# Altium PCB LeoBlinky2018.PcbDoc
Units mm, origin at the board's own origin, x right, y up, seen from the top; angles counter-clockwise.
Board outline 140 x 67 mm, 2 copper layers (Top Layer, Bottom Layer), stack 0.98 mm thick; 46 components, 62 nets, 221 pads, 70 vias.
Unrouted connection lines stored in the file: 16.
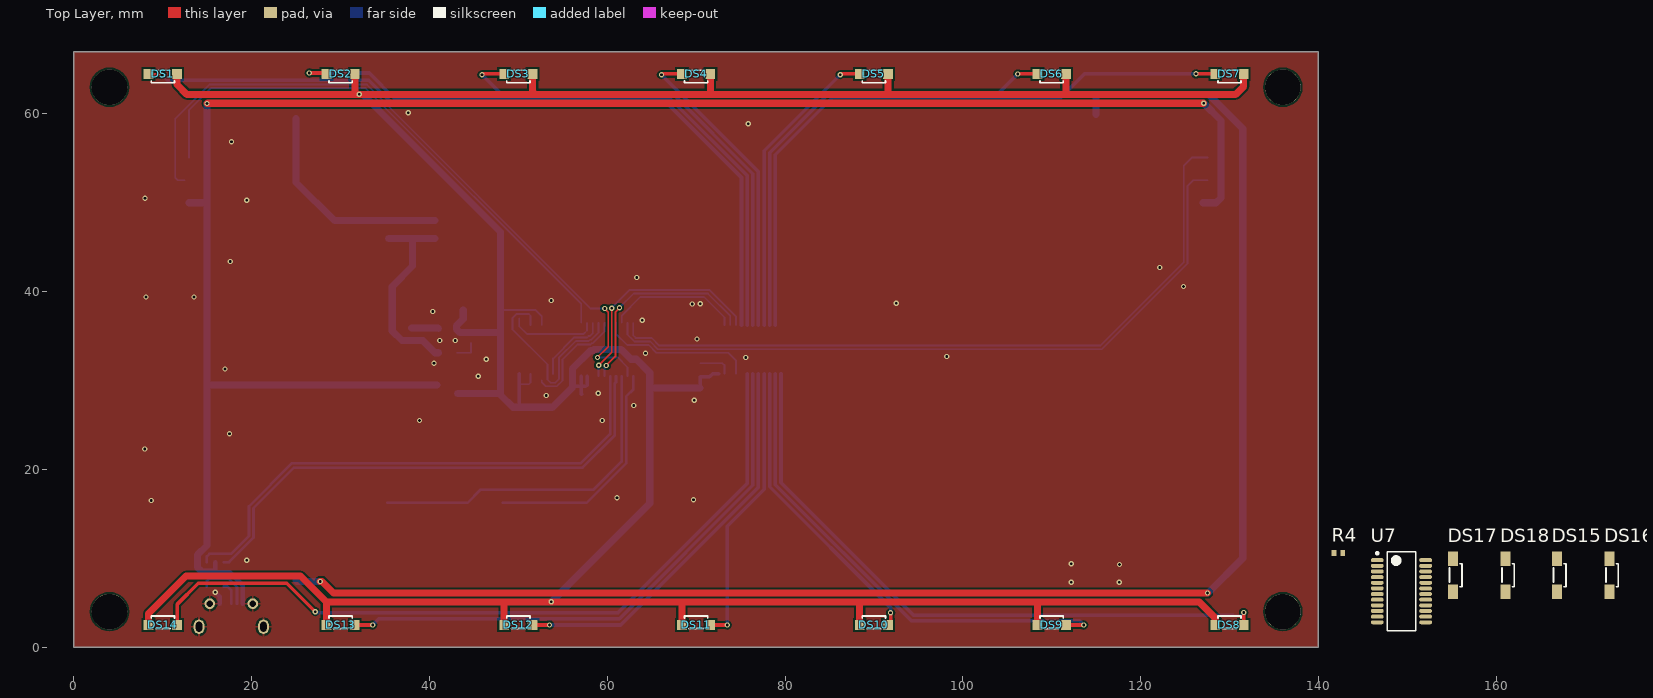
[diagram p0: Top Layer view]
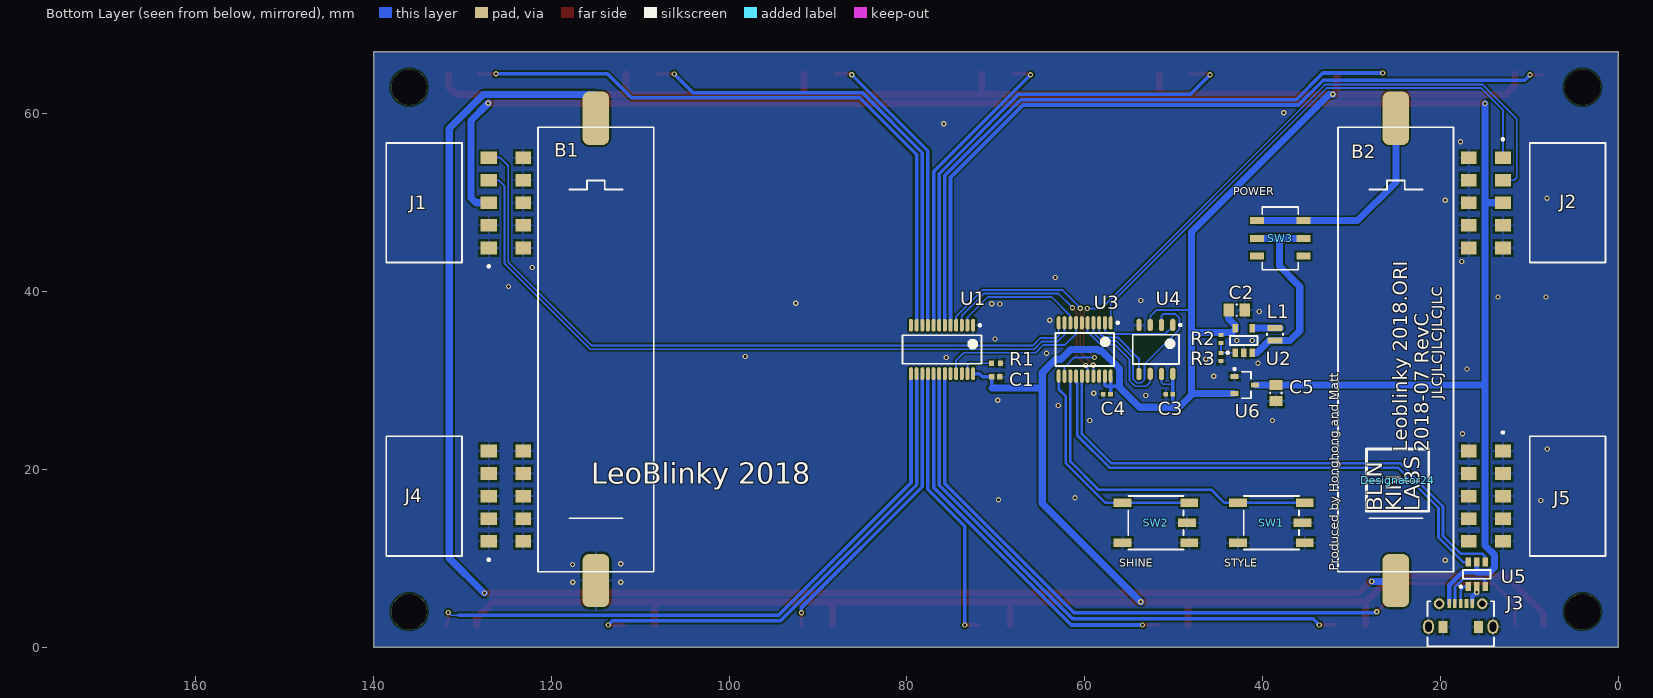
[diagram p1: Bottom Layer view, seen from below]

## Layer stack, top to bottom
Top Solder: solder mask 0.01, Solder Resist, Dk 3.5
Top Layer: signal copper 0.035
Dielectric 1: dielectric 0.91, FR-4, Dk 4.8
Bottom Layer: signal copper 0.035
Bottom Solder: solder mask 0.01, Solder Resist, Dk 3.5

## Board outline
0,0 0,67 140,67 140,0

## Design rules (kind name [scope] priority, off if disabled: settings)
Clearance [All] p1: gap=0.2 ignorepadtopadclearanceinfootprint=FALSE
DiffPairsRouting [All] p1: maxlimit=0.2 minlimit=0.2 mostfreqgap=0.2 toplayer_minwidth=0.3 toplayer_maxwidth=0.6 toplayer_prefwidth=0.6 bottomlayer_minwidth=0.3 bottomlayer_maxwidth=0.6 bottomlayer_prefwidth=0.6 maxuncoupledlength=12.7
PolygonConnect [All] p1: thpad.connectstyle=Relief thpad.reliefconductorwidth=0.254 thpad.reliefentries=4 thpad.polygonreliefangle="90 Angle" thpad.airgapwidth=0.254 smdpad.connectstyle=Relief smdpad.reliefconductorwidth=0.254 smdpad.reliefentries=4 smdpad.polygonreliefangle="90 Angle" smdpad.airgapwidth=0.254 via.connectstyle=Direct via.reliefconductorwidth=0.254 via.reliefentries=4 via.polygonreliefangle="90 Angle" via.airgapwidth=0.254
RoomDefinition LeoBlinky2018 [InComponentClass('LeoBlinky2018')] p1: confinementstyle=ConfineIn formatcopy=TRUE lockcomponents=FALSE outline -3,-1.5 -3,71.5 143,71.5 143,-1.5
RoutingVias [All] p1: holewidth=0.711 width=1.27 viastyle="Through Hole" minholewidth=0.3 minwidth=0.6 maxholewidth=0.711 maxwidth=1.27
SolderMaskExpansion SolderMaskExpansion_Via [IsVia] p1: expansion=-99
SolderMaskExpansion [All] p2: expansion=0.102
Width [All] p1: maxlimit=2 minlimit=0.2 preferedwidth=0.4
29 further rules are at their usual default settings.

## Classes and differential pairs
differential pair USB_D: +USB_D_P -USB_D_N

## Components (designator, comment, footprint, x,y, rotation, side; value= is the part's Value field where it differs from the comment)
B1 "AAA_SMD" AAA_SMD 115,33.5 r90 bottom
B2 "AAA_SMD" AAA_SMD 25,33.5 r90 bottom
C1 "CAP 100nF 16V 0402(1005)" CAPC0402(1005)60_N 70,30.425 r0 bottom value=100nF
C2 "CAP 10uF 10V 0805(2012)" CAPC0805(2012)145_N 42.895,37.925 r0 bottom value=10uF
C3 "CAP 100nF 10V 0402(1005)" CAPC0402(1005)60_L 50.495,28.45 r180 bottom value=100nF
C4 "CAP 100nF 10V 0402(1005)" CAPC0402(1005)60_L 57.5,28.45 r180 bottom value=100nF
C5 "CAP 10uF 10V 0805(2012)" CAPC0805(2012)145_N 38.5,28.6 r90 bottom value=10uF
Designator24 "Comment" BLINKINLABS_LOGO 24.8,18.8 r90 bottom
DS1 "LED_335_GENERIC" LED_335_GENERIC#1 10,64.5 r0 top
DS2 "LED_335_GENERIC" LED_335_GENERIC#1 30,64.5 r0 top
DS3 "LED_335_GENERIC" LED_335_GENERIC#1 50,64.5 r0 top
DS4 "LED_335_GENERIC" LED_335_GENERIC#1 70,64.5 r0 top
DS5 "LED_335_GENERIC" LED_335_GENERIC#1 90,64.5 r0 top
DS6 "LED_335_GENERIC" LED_335_GENERIC#1 110,64.5 r0 top
DS7 "LED_335_GENERIC" LED_335_GENERIC#1 130,64.5 r0 top
DS8 "LED_335_GENERIC" LED_335_GENERIC#1 130,2.5 r180 top
DS9 "LED_335_GENERIC" LED_335_GENERIC#1 110,2.5 r180 top
DS10 "LED_335_GENERIC" LED_335_GENERIC#1 90,2.5 r180 top
DS11 "LED_335_GENERIC" LED_335_GENERIC#1 70,2.5 r180 top
DS12 "LED_335_GENERIC" LED_335_GENERIC#1 50,2.5 r180 top
DS13 "LED_335_GENERIC" LED_335_GENERIC#1 30,2.5 r180 top
DS14 "LED_335_GENERIC" LED_335_GENERIC#1 10,2.5 r180 top
DS15 "LED_335_GENERIC" LED_335_GENERIC#2 166.849,8.1 r90 top
DS16 "LED_335_GENERIC" LED_335_GENERIC#2 172.749,8.1 r90 top
DS17 "LED_335_GENERIC" LED_335_GENERIC#2 155.149,8.1 r90 top
DS18 "LED_335_GENERIC" LED_335_GENERIC#2 161.049,8.1 r90 top
J1 "SMH-105-02-T-D" SMTC-SMH-105-02-X-D 130.5,50 r90 bottom
J2 "SMH-105-02-T-D" SMTC-SMH-105-02-X-D 9.5,50 r270 bottom
J3 "A01SB741B1-267" A01SB741B1-267 17.7,4.9 r0 bottom
J4 "SMH-105-02-T-D" SMTC-SMH-105-02-X-D 130.5,17 r90 bottom
J5 "SMH-105-02-T-D" SMTC-SMH-105-02-X-D 9.5,17 r270 bottom
L1 "FNR201610S2R2MT" FNR201610S 38.611,35.2 r90 bottom
R1 "2K 1% 0402(1005)" RESC0402(1005)_N 70,31.95 r0 bottom value="2000.00 Ohm"
R2 "200K 1% 0402(1005)" RESC0402(1005)_L 44.675,34.7 r90 bottom value="200000.00 Ohm"
R3 "51K 1% 0402(1005)" RESC0402(1005)_L 44.675,32.675 r90 bottom value="51000.00 Ohm"
R4 "2K 1% 0402(1005)" RESC0402(1005)_N 142.249,10.6 r0 top value="2000.00 Ohm"
SW1 "STYLE" TD-07XB 39,14 r0 bottom
SW2 "SHINE" TD-07XB 52,14 r0 bottom
SW3 "POWER" MSK-1133-NOHOLE 38,46 r180 bottom
U1 "ICN2053" SOP64P600X175-24N 76.058,33.5 r270 bottom
U2 "BL8542C" SOT95P280X130-5N 42.111,34.5 r90 bottom
U3 "CH554T" TSOP65P660X110-20N 60,33.5 r270 bottom
U4 "FM25Q08A-SO" SOP127P600X175-8N 52,33.5 r270 bottom
U5 "USBLC6-2SC6" SOT95P280X145-6N 15.9,8.2 r90 bottom
U6 "SC662K-3.3V" SOT95P230X117-3N 42,29.5 r180 bottom
U7 "ICN2053" SOP64P600X175-24N 149.349,6.3 r0 top

## Footprints (in the part's own frame and the unit in brackets; to place one, negate y for a bottom-side part, rotate by r counter-clockwise, add the part's x,y. Pads: shape width x height; smd on the part's side, far side on the other; paste and mask are expansions set on the pad)
A01SB741B1-267 [mm] "micro usb B type"
  rect 0.4x1 smd: D+(0,0) D-(0.65,0) GND(-1.3,0) ID(-0.65,0) VBUS(1.3,0)
  rrect100% 1.2x1.6 hole 0.7 slot 1.1 at 90 deg: S1(-3.625,2.6) S2(3.625,2.6)
  round 1.2 hole 0.7: S3(-2.425,0) S4(2.425,0)
  rect 1x1.35 smd: S5(-2,2.6) S6(2,2.6)
  silkscreen extent -3.75,-0.26 3.75,4.8, body extent -3.75,-0.3 3.75,4.78, height 2.44
AAA_SMD [mm]
  rrect50% 6x3 smd paste+0: 1(26,0) 2(-26,0)
  silkscreen extent -25,-6.5 25,6.5, body extent -25,-6.58 25,6.58, height 12
BLINKINLABS_LOGO [mm] "Square blinkinlabs logo"
  silkscreen extent -3.51,-3.51 3.5,3.5
CAPC0402(1005)60_L [mm] "Chip Capacitor, Body 1.0x0.5mm, Height 0.6mm, IPC High Density"
  rect 0.52x0.52 smd: 1(-0.4,0) 2(0.4,0)
  body extent -0.55,-0.3 0.55,0.3, height 0.6
CAPC0402(1005)60_N [mm] "Chip Capacitor, Body 1.0x0.5mm, Height 0.6mm, IPC Medium Density"
  rect 0.62x0.62 smd: 1(-0.45,0) 2(0.45,0)
  body extent -0.55,-0.3 0.55,0.3, height 0.6
CAPC0805(2012)145_N [mm] "Chip Capacitor, Body 2.0x1.2mm, Height 1.45mm, IPC Medium Density"
  rect 1.15x1.45 smd: 1(-0.9,0) 2(0.9,0)
  silkscreen extent -0.05,-0.62 0.05,0.63, body extent -1.1,-0.72 1.1,0.73, height 1.45
FNR201610S [mm] "Wire Wound SMD Power Inductors 2.0×1.6×1.0"
  rrect25% 0.7x1.7 smd paste+0: 1(-0.7,0) 2(0.7,0)
  silkscreen extent -0.1,-0.9 0.1,0.9, body extent -1,-0.8 1,0.8, height 0.95
LED_335_GENERIC#1 [mm] "SMD LED, side visible, generic"
  rect 1.1x1.1 smd paste+0: 1(-1.6,0) 2(1.6,0)
  silkscreen extent -1.3,-1 1.3,0.4, body extent -2,-1 2,0.4, height 0.8
LED_335_GENERIC#2 [mm] "SMD LED, side visible, generic"
  rect 1.6x1.1 smd paste+0: 1(-1.85,0) 2(1.85,0)
  silkscreen extent -1.3,-1 1.3,0.4, body extent -2,-1 2,0.4, height 0.8
MSK-1133-NOHOLE [mm] "SMD micro toggle switch, 2 position, 2 circuit"
  rect 1.55x0.8 smd paste+0: 1(-2.62,2) 2(-2.62,0) 3(-2.62,-2) 4(2.62,-2) 5(2.62,0) 6(2.62,2)
  silkscreen extent -2.02,-3.52 2.02,3.52
RESC0402(1005)_L [mm] "Chip Resistor, Body 1.0x0.5mm, IPC High Density"
  rect 0.45x0.55 smd: 1(-0.45,0) 2(0.45,0)
  body extent -0.52,-0.27 0.53,0.28, height 0.4
RESC0402(1005)_N [mm] "Chip Resistor, Body 1.0x0.5mm, IPC Medium Density"
  rect 0.55x0.65 smd: 1(-0.5,0) 2(0.5,0)
  body extent -0.52,-0.27 0.53,0.28, height 0.4
SMTC-SMH-105-02-X-D [mm] "Horizontal SMT Socket Assembly, 2x5 Pins, 2.54mm Pitch, Female"
  rect 1.42x1.83 smd: 1(-5.08,-3.453) 3(-2.54,-3.453) 5(0,-3.453) 7(2.54,-3.453) 9(5.08,-3.453)
  rect 1.42x1.73 smd: 2(-5.08,-7.313) 4(-2.54,-7.313) 6(0,-7.313) 8(2.54,-7.313) 10(5.08,-7.313)
  silkscreen extent -7.28,-3.58 6.73,8.08, body extent -6.6,-7.67 6.6,8.08, height 4.95
SOP64P600X175-24N [mm] "SOP, 24-Leads, Body 8.65x3.90mm, Pitch 0.64mm, IPC Medium Density"
  oval 1.45x0.45 smd: 1(-2.725,3.492) 2(-2.725,2.857) 3(-2.725,2.222) 4(-2.725,1.587) 5(-2.725,0.952) 6(-2.725,0.317) 7(-2.725,-0.318) 8(-2.725,-0.953) 9(-2.725,-1.588) 10(-2.725,-2.223) 11(-2.725,-2.858) 12(-2.725,-3.493) 13(2.725,-3.493) 14(2.725,-2.858) 15(2.725,-2.223) 16(2.725,-1.588) 17(2.725,-0.953) 18(2.725,-0.318) 19(2.725,0.317) 20(2.725,0.952) 21(2.725,1.587) 22(2.725,2.222) 23(2.725,2.857) 24(2.725,3.492)
  silkscreen extent -2.85,-4.45 1.6,4.45, body extent -3,-4.45 3,4.45, height 1.75
SOP127P600X175-8N [mm] "SOP, 8-Leads, Body 4.93x3.90mm, Pitch 1.27mm, IPC Medium Density"
  oval 1.4x0.6 smd: 1(-2.75,1.905) 2(-2.75,0.635) 3(-2.75,-0.635) 4(-2.75,-1.905) 5(2.75,-1.905) 6(2.75,-0.635) 7(2.75,0.635) 8(2.75,1.905)
  silkscreen extent -2.87,-2.6 1.65,2.88, body extent -3,-2.6 3,2.6, height 1.75
SOT95P230X117-3N [mm] "SOT23, 3-Leads, Body 2.90x2.30mm, Pitch 0.95mm, IPC Medium Density"
  rect 0.9x0.6 smd: 1(-1.15,0.95) 2(-1.15,-0.95) 3(1.15,0)
  silkscreen extent -1.28,-1.5 0.7,1.92, body extent -1.24,-1.5 1.25,1.5, height 1.17
SOT95P280X130-5N [mm] "SOT23, 5-Leads, Body 2.90x2.80mm, Pitch 0.95mm, IPC Medium Density"
  rect 0.95x0.6 smd: 1(-1.375,0.95) 2(-1.375,0) 3(-1.375,-0.95) 4(1.375,-0.95) 5(1.375,0.95)
  silkscreen extent -1.5,-1.55 0.5,1.93, body extent -1.5,-1.55 1.5,1.55, height 1.3
SOT95P280X145-6N [mm] "SOT23, 6-Leads, Body 2.93x2.80mm, Pitch 0.95mm, IPC Medium Density"
  rect 1x0.6 smd: 1(-1.375,0.95) 2(-1.375,0) 3(-1.375,-0.95) 4(1.375,-0.95) 5(1.375,0) 6(1.375,0.95)
  silkscreen extent -1.5,-1.55 0.5,1.93, body extent -1.6,-1.52 1.6,1.53, height 1.45
TD-07XB [mm] "TACT SWITCH"
  rect 2x1 smd paste+0: 1(-3.75,-2.25) 2(3.75,-2.25) 3(-3.75,2.25) 4(3.75,2.25) 5(-3.5,0)
  silkscreen extent -3.1,-3 3.1,3
TSOP65P660X110-20N [mm] "TSOP, 20-Leads, Body 6.50x4.40mm, Pitch 0.65mm, IPC Medium Density"
  oval 1.5x0.45 smd: 1(-3,2.925) 2(-3,2.275) 3(-3,1.625) 4(-3,0.975) 5(-3,0.325) 6(-3,-0.325) 7(-3,-0.975) 8(-3,-1.625) 9(-3,-2.275) 10(-3,-2.925) 11(3,-2.925) 12(3,-2.275) 13(3,-1.625) 14(3,-0.975) 15(3,-0.325) 16(3,0.325) 17(3,0.975) 18(3,1.625) 19(3,2.275) 20(3,2.925)
  silkscreen extent -3.12,-3.3 1.85,3.82, body extent -3.3,-3.3 3.3,3.3, height 1.1

## Part data
B1 B2: "AAA battery holder, surface mount."
C1: library part CMP-1034-02071-1, "CAP 100nF 16V -20% to +80% 0402 (1005 Metric) Thickness 0.6mm SMD", Case-EIA=0402, Case-Metric=1005, Rated Voltage="16 V", Tolerance="-20% to +80%", Max Thickness="0.6 mm", Technology=SMT
C2 C5: library part CMP-1036-04922-1, "CAP 10uF 10V ±10% 0805 (2012 Metric) Thickness 1.45mm SMD", Case-EIA=0805, Case-Metric=2012, Rated Voltage="10 V", Tolerance=±10%, Max Thickness="1.45 mm", Technology=SMT
C3 C4: library part CMP-1034-02065-1, "CAP 100nF 10V ±10% 0402 (1005 Metric) Thickness 0.6mm SMD", Case-EIA=0402, Case-Metric=1005, Rated Voltage="10 V", Tolerance=±10%, Max Thickness="0.6 mm", Technology=SMT
DS1 DS2 DS3 DS4 DS5 DS6 DS7 DS8 DS9 DS10 DS11 DS12 DS13 DS14 DS15 DS16 DS17 DS18: "SMD LED, side visible, generic"
J1 J2 J4 J5: library part CMP-1023-00158-1, "SMT Horizontal Socket, -55 to 105 degC, 2.54 mm Pitch, 10-Pin, Female, RoHS", Manufacturer=Samtec, Temperature Range="-55 to 105 degC", ComponentLink1Description="Manufacturer URL", ComponentLink1URL=http://www.samtec.com, ComponentLink2Description=Datasheet, ComponentLink2URL=http://www.samtec.com/documents/webfiles/pdf/SMH.PDF, ComponentLink3Description="Package Specification", ComponentLink3URL=http://www.samtec.com/documents/webfiles/cpdf/SMH-1XX-XX-XX-X-XX-MKT.pdf, DatasheetVersion=F-214, Mounting Technology="Surface Mount", Orientation=Horizontal, PackageDescription=".100 [2.54] Horizontal SMT Socket Assembly", PackageReference=SMH-105-02-X-D, PackageVersion="AF, 2/1999", PartNumber=SMH-105-02-T-D, Pitch="2.54 mm", RoHS=True
J3: "Micro USB B type ??????"
L1: "Wire Wound SMD Power Inductors 2.0×1.6×1.0 2.2uH"
R1 R4: library part CMP-1011-00542-1, "2K 0.063W 1% 0402 (1005 Metric)  SMD", Case-EIA=0402, Case-Metric=1005, Power="0.063 W", Tolerance="1 %", Technology=SMT
R2: library part CMP-1011-00768-1, "200K 0.063W 1% 0402 (1005 Metric)  SMD", Case-EIA=0402, Case-Metric=1005, Power="0.063 W", Tolerance="1 %", Technology=SMT
R3: library part CMP-1011-00703-1, "51K 0.063W 1% 0402 (1005 Metric)  SMD", Case-EIA=0402, Case-Metric=1005, Power="0.063 W", Tolerance="1 %", Technology=SMT
SW1 SW2: library part TD-07XB, "Tact Switch", Manufacturer="ShenZhen XieJia Electronics Co Ltd", PartNumber=TD-07XB
SW3: library part MSK-1133, "SMD micro toggle switch, 2 position, 2 circuit"
U1 U7: "16-Channel PWM Constant Current LED Sink Driver", Manufacturer=ChipOne, PartNumber=ICN2053
U2: "0.85V startup, 1MHz, 300mA Iout,  Synchronous Boost Converter (adjustable output)", Manufacturer=Belling, PartNumber=BL8542C
U3: "8-bit enhanced USB microcontroller", Manufacturer=WCH, PartNumber=CH554T
U4: "8M-BIT SERIAL FLASH MEMORY, 150mil width", Manufacturer="Shanghai Fudan Microelectronics Group Company Limited", PartNumber=FM25Q08A-SO
U5: "Very low capacitance ESD protection", Manufacturer=STMicroelectronics, ComponentLink2Description=Datasheet, ComponentLink2URL=USBLC6-2.pdf, PartNumber=USBLC6-2SC6
U6: "3.3V, 250mA Low dropout voltage regulator IC"

## Free pads (board coordinates)
  round 4 hole 4 paste-99: 1(4,4) 1(4,63) 1(136,4) 1(136,63)

## Via types
v1: diameter 0.6, hole 0.3, Top Layer to Bottom Layer, 70 vias

## Nets (pads, with @x,y where several pads share a name; then routed paths per layer and width w, separated by ;. In a path a pad name is that pad's centre, name@x,y a point inside that pad or via, vN(x,y) a via of type N, cw(c..) or ccw(c..) an arc to the next point about the centre after c; other vN are vias at no path point)
5V_USB: C5.2 J1.5 J2.5 J3.VBUS U5.5 U6.3 | length 215.6
  Top Layer w0.8: v1(14.975,61.162) 15.013,61.2 v1(127.1,61.2)
  Bottom Layer w0.5: U5.5 15.9,8.45 17.531,8.45 19,6.981 J3.VBUS
  Bottom Layer w0.8: J2.5 14.7,50 14.968,50.268 ; v1(14.975,61.162) 14.975,51.975 14.968,51.968 14.968,50.268 ; 15.9,8.45 14.426,8.45 13.9,8.976 13.9,10.393 14.968,11.461 14.968,29.5 ; U6.3 C5.2 14.968,29.5 ; J1.5 128.5,50 129.05,50.55 129.05,59.25 v1(127.1,61.2) ; 14.968,29.5 14.968,50.268
BUTTON1: SW1.1 SW1.2 U3.13 | length 37.9
  Bottom Layer w0.3: SW1.1 SW1.2 44.262,16.25 45.712,17.7 58.425,17.7 61.625,20.9 U3.13
BUTTON2: SW2.1 SW2.2 U3.11 | length 25.9
  Bottom Layer w0.3: SW2.1 SW2.2 57.682,16.25 62.125,20.693 62.125,28.189 62.925,28.989 U3.11
FLASH_CS: U3.2 U4.1 | length 9.9
  Bottom Layer w0.2: 50.095,37 50.095,36.086 50.931,35.25 57.338,35.25 57.725,35.637 U3.2
FLASH_MISO: U3.4 U4.2 | length 22.6
  Bottom Layer w0.2: U4.2 51.365,37.281 51.152,37.494 49.819,37.494 49.325,37 49.325,35.764 53.275,31.814 53.275,30.1 53.625,29.75 54.154,29.75 54.558,30.154 54.558,32.555 56.452,34.45 57.922,34.45 58.071,34.6 58.2,34.6 59.025,35.425 U3.4
FLASH_MOSI: U3.3 U4.5 | length 8.5
  Bottom Layer w0.2: U4.5 53.905,32.468 56.287,34.85 57.756,34.85 57.906,35 58.034,35 58.375,35.341 U3.3
FLASH_SCK: U3.5 U4.6 | length 12.4
  Bottom Layer w0.2: 52.635,30 52.635,29.8 53.085,29.35 54.319,29.35 54.975,30.006 54.975,32.407 56.618,34.05 58.087,34.05 58.237,34.2 58.365,34.2 59.675,35.51 U3.5
GND: B1.2 C1.1 C2.1 C3.1 C4.1 C5.1 J1.1 J1.2 J1.3 J1.4 J1.6 J1.8 J1.10 J2.2 J2.4 J2.6 J2.7 J2.8 J2.9 J2.10 J3.GND J3.S1 J3.S2 J3.S3 J3.S4 J3.S5 J3.S6 J4.1 J4.2 J4.3 J4.4 J4.5 J4.6 J4.7 J4.8 J4.9 J4.10 J5.1 J5.2 J5.3 J5.4 J5.5 J5.6 J5.7 J5.8 J5.9 J5.10 R1.1 R3.1 R4.1 SW1.3 SW1.4 SW1.5 SW2.3 SW2.4 SW2.5 U1.1 U2.2 U3.18 U4.4 U5.2 U6.1 U7.1 | length 1.5
  Bottom Layer w0.5: v1(15.9,6.2) 16.4,5.7 J3.GND
  other v1: 112.2,7.3 117.6,7.3 117.625,9.3 112.2,9.375 19.425,9.8 8.7,16.5 69.7,16.607 61.1,16.8 7.98,22.3 17.5,24 38.879,25.5 59.433,25.5 62.99,27.2 69.8,27.8 53.135,28.323 59,28.577 45.482,30.5 17,31.3 40.5,31.95 46.4,32.4 75.6,32.6 98.2,32.7 64.3,33.058 41.161,34.5 42.895,34.5 70.1,34.675 63.937,36.8 40.38,37.767 69.55,38.612 70.45,38.625 92.5,38.7 53.699,39 8.1,39.4 13.5,39.4 124.825,40.575 63.325,41.6 122.175,42.725 17.6,43.4 19.425,50.275 8,50.5 17.725,56.85 75.875,58.9 37.6,60.12
LED0: DS1.1 U1.5 | length 88
  Top Layer w0.4: DS1.1@8.5,64.4 v1(9.9,64.4)
  Bottom Layer w0.4: v1(9.9,64.4) 10.5,63.8 33.173,63.8 35.973,61 66.954,61 75.105,52.849 U1.5
LED1: DS2.1 U1.6 | length 72.6
  Top Layer w0.4: v1(26.487,64.6) 28.05,64.6 DS2.1@28.15,64.5
  Bottom Layer w0.4: v1(26.487,64.6) 33.221,64.6 36.221,61.6 67.203,61.6 75.74,53.063 U1.6
LED2: DS3.1 U1.7 | length 54.4
  Top Layer w0.4: v1(45.9,64.4) 46,64.5 DS3.1@48.15,64.5
  Bottom Layer w0.4: v1(45.9,64.4) 48.1,62.2 67.451,62.2 76.375,53.276 U1.7
LED3: DS4.1 U1.8 | length 34.8
  Top Layer w0.4: v1(66.1,64.4) 66.2,64.5 DS4.1@68.15,64.5
  Bottom Layer w0.4: v1(66.1,64.4) 77.01,53.49 U1.8
LED4: DS5.1 U1.9 | length 33.7
  Top Layer w0.4: v1(86.2,64.4) 86.3,64.5 DS5.1@88.15,64.5
  Bottom Layer w0.4: U1.9 77.645,55.845 v1(86.2,64.4)
LED5: DS6.1 U1.10 | length 52.9
  Top Layer w0.4: v1(106.2,64.484) 106.216,64.5 DS6.1@108.15,64.5
  Bottom Layer w0.4: U1.10 78.28,55.632 85.049,62.4 104.116,62.4 v1(106.2,64.484)
LED6: DS7.1 U1.11 | length 72.2
  Top Layer w0.4: v1(126.239,64.5) DS7.1@128.15,64.5
  Bottom Layer w0.4: U1.11 78.915,55.418 85.297,61.8 111,61.8 113.7,64.5 v1(126.239,64.5)
LED7: DS15.1 U1.12
LED8: DS8.1 U1.13 | length 72.1
  Top Layer w0.4: v1(131.6,3.9) 131.6,2.75 DS8.1@131.85,2.5
  Bottom Layer w0.2: 130.4,3.6 131.3,3.6 v1(131.6,3.9)
  Bottom Layer w0.4: U1.13 79.55,18.498 94.449,3.6 130.4,3.6
LED9: DS9.1 U1.14 | length 55.5
  Top Layer w0.4: DS9.1@111.85,2.5 v1(113.6,2.5)
  Bottom Layer w0.4: U1.14 78.915,18.285 94.2,3 113.1,3 v1(113.6,2.5)
LED10: DS10.1 U1.15 | length 33.9
  Top Layer w0.4: DS10.1@91.85,2.5 91.875,2.525 v1(91.875,3.875)
  Bottom Layer w0.4: U1.15 78.28,18.071 91.875,4.476 v1(91.875,3.875)
LED11: DS11.1 U1.16 | length 31.6
  Top Layer w0.4: DS11.1@71.85,2.5 v1(73.5,2.5)
  Bottom Layer w0.4: v1(73.5,2.5) 73.5,13.625 77.645,17.77 U1.16
LED12: DS12.1 U1.17 | length 44.4
  Top Layer w0.4: DS12.1@51.85,2.5 v1(53.5,2.5)
  Bottom Layer w0.4: v1(53.5,2.5) 61.52,2.5 77.01,17.99 U1.17
LED13: DS13.1 U1.18 | length 63.6
  Top Layer w0.4: DS13.1@31.85,2.5 v1(33.6,2.5)
  Bottom Layer w0.4: v1(33.6,2.5) 34.3,3.2 61.372,3.2 76.375,18.204 U1.18
LED14: DS14.1 U1.19 | length 87.2
  Top Layer w0.4: DS14.1 11.6,4.8 14,7.2 23.947,7.2 v1(27.147,4)
  Bottom Layer w0.4: v1(27.147,4) 27.247,3.9 29.8,3.9 61.223,3.9 75.74,18.417 U1.19
LED15: DS16.1 U1.20
LED16: DS17.1 U7.5
LED17: U7.6
LED18: U7.7
LED19: U7.8
LED20: U7.9
LED21: U7.10
LED22: U7.11
LED23: U7.12
LED24: DS18.1 U7.13
LED25: U7.14
LED26: U7.15
LED27: U7.16
LED28: U7.17
LED29: U7.18
LED30: U7.19
LED31: U7.20
LED_CLK: U1.3 U3.16 U7.3 | length 23.4
  Top Layer w0.2: v1(59.9,31.7) 60.913,32.713 60.913,37.692 61.371,38.15 v1(61.371,38.209)
  Bottom Layer w0.2: U3.16 v1@59.675,31.575 ; v1@61.371,38.2 62.971,39.8 71.326,39.8 73.835,37.291 U1.3
LED_GCLK: U1.21 U3.7 U7.21 | length 17.5
  Bottom Layer w0.2: U3.7 60.975,35.274 62.249,34 64.649,34 65.516,33.133 73.617,33.133 74.47,32.28 U1.21
LED_LE: U1.4 U3.17 U7.4 | length 25.3
  Top Layer w0.2: v1(59.025,31.719) 60.505,33.199 60.505,35.9 60.513,35.908 v1(60.513,38.141)
  Bottom Layer w0.2: U3.17 v1(59.025,31.719) ; v1(60.513,38.141) 60.513,38.184 60.505,38.192 62.513,40.2 71.491,40.2 74.47,37.221 U1.4
LED_MOSI: U1.2 U3.8 | length 15.1
  Bottom Layer w0.2: U3.8 61.625,37.3 63.725,39.4 70.9,39.4 73.2,37.1 U1.2
LED_MOSI1: U1.22 U7.2
NetB1_1: B1.1 B2.2 | length 177.3
  Top Layer w0.8: v1(27.7,7.4) 27.912,7.4 29.212,6.1 v1(127.534,6.1)
  Bottom Layer w0.8: B2.2 25.1,7.4 v1(27.7,7.4) ; B1.1@115,59.958 115,62.1 115.1,62.2 127.675,62.2 131.5,58.375 131.5,10 127.6,6.1 v1(127.534,6.1)
NetL1_2: L1.2 U2.4 | length 3
  Bottom Layer w0.8: L1.2@38,35.9 L1.2 40.975,35.9 U2.4@41,35.875
NetR1_2: R1.2 U1.23 | length 3.7
  Bottom Layer w0.2: R1.2 72.958,31.95 73.2,31.708 U1.23
NetR4_2: R4.2 U7.23
RESET: U3.6
RXD: J1.9 U3.10 | length 81.6
  Bottom Layer w0.2: U3.10 62.925,35.066 63.191,34.8 64.98,34.8 65.847,33.933 115.483,33.933 124.869,43.319 124.869,54.169 125.78,55.08 J1.9 J1.9@127.547,55.08
RXD1: J2.3 U3.12 | length 79.1
  Top Layer w0.2: v1(58.9,32.6) 60.105,33.805 60.105,36.066 60.113,36.074 60.113,37.692 v1(59.705,38.1)
  Bottom Layer w0.2: J2.3@12.453,52.54 11.693,52.54 11.4,52.833 11.4,59.472 15.228,63.3 32.966,63.3 58.166,38.1 v1(59.705,38.1) ; v1(58.9,32.6) 61.175,32.6 62.275,31.5 U3.12
TXD: J1.7 U3.9 | length 80.3
  Bottom Layer w0.2: U3.9 62.275,35.15 63.025,34.4 64.814,34.4 65.682,33.533 115.648,33.533 125.269,43.153 125.269,51.878 125.931,52.54 J1.7 J1.7@127.547,52.54
TXD1: J2.1 U3.1 | length 62.7
  Bottom Layer w0.2: J2.1 12.953,60.459 15.394,62.9 32.8,62.9 57.075,38.625 U3.1
USB_D_N: U3.15 U5.4 | length 60.2
  Bottom Layer w0.3: U5.4 14.95,10.224 15.226,10.5 17.664,10.5 19.7,12.536 19.7,15.857 24.543,20.7 57.029,20.7 60.325,23.996 U3.15
USB_D_P: U3.14 U5.6 | length 58.6
  Bottom Layer w0.3: U5.6 17.447,9.575 20.2,12.328 20.2,15.65 24.75,20.2 57.236,20.2 60.825,23.789 60.825,29.662 60.975,29.812 U3.14
USB_IN_D_N: J3.D- U5.3 | length 6.4
  Bottom Layer w0.3: U5.3 14.95,7.447 15.203,7.7 17.432,7.7 18.35,6.782 J3.D-
USB_IN_D_P: J3.D+ U5.1 | length 2.5
  Bottom Layer w0.3: U5.1 17.275,6.825 17.7,6.4 J3.D+
VBAT: L1.1 SW3.2 SW3.5 U2.3 | length 22.8
  Bottom Layer w0.8: SW3.5 38.1,46 ; SW3.2 38.1,46 ; U2.3@41,33.125 40.614,33.125 39.239,34.5 L1.1 36.9,34.5 35.817,35.583 35.817,40.6 38.1,42.883 38.1,46
VBAT_IN: B2.1 SW3.1 SW3.6 | length 24.6
  Bottom Layer w0.8: B2.1 25,52.3 29.3,48 SW3.6 SW3.1
VCC: C1.2 C2.2 C3.2 C4.2 DS1.2 DS2.2 DS3.2 DS4.2 DS5.2 DS6.2 DS7.2 DS8.2 DS9.2 DS10.2 DS11.2 DS12.2 DS13.2 DS14.2 DS15.2 DS16.2 DS17.2 DS18.2 R2.2 U1.24 U2.5 U3.19 U3.20 U4.3 U4.7 U4.8 U6.2 U7.24 | length 406.6
  Top Layer w0.8: DS14.2 8.4,3.8 12.6,8 25.5,8 28.4,5.1 ; DS1.2 11.6,63.3 12.7,62.2 v1@31.9,62.2 ; DS13.2 28.4,5.1 ; DS2.2 31.6,62.5 v1@31.9,62.2 ; DS12.2 48.4,4.85 48.15,5.1 ; DS3.2 51.6,62.5 51.9,62.2 ; 68.15,5.094 68.4,4.844 DS11.2 ; DS4.2 71.6,62.3 71.7,62.2 ; DS10.2 88.4,4.85 88.15,5.1 ; DS5.2 91.6,62.45 91.85,62.2 ; DS9.2 108.4,4.85 108.15,5.1 ; DS6.2 111.6,62.4 111.8,62.2 ; DS8.2 128.4,3.3 126.6,5.1 108.15,5.1 ; DS7.2 131.6,63.1 130.7,62.2 111.8,62.2 ; 28.4,5.1 48.15,5.1 ; v1@31.9,62.2 v1(32.1,62.2) 51.9,62.2 ; 48.15,5.1 68.15,5.1 88.15,5.1 ; 51.9,62.2 71.7,62.2 ; 71.7,62.2 91.85,62.2 ; 88.15,5.1 108.15,5.1 ; 91.85,62.2 111.8,62.2
  Bottom Layer w0.2: 48,37.602 48.323,37.925 51.95,37.925 52.635,37.24 U4.3 ; 50.095,29.575 51.185,29.575 51.365,29.755 U4.7
  Bottom Layer w0.4: 50.095,27 C3.2 50.095,29.575 U4.8 ; 56.1,29.253 56.197,29.35 57.075,29.35 ; U3.20 57.075,29.35 ; C4.2 57.075,28.475 57.075,29.35 ; U3.19 57.725,29.49 57.585,29.35 57.075,29.35 ; 70.45,29.15 C1.2 71.5,30.425 71.85,30.775 U1.24
  Bottom Layer w0.8: v1(32.1,62.2) 32.51,62.2 48,46.71 48,37.602 48,35.393 ; U6.2 47.843,28.55 48,28.393 ; C2.2 43.795,36.919 43.061,36.184 U2.5 43.061,35.733 43.401,35.393 48,35.393 ; v1(53.7,5.1) 64.785,16.185 64.785,29.15 ; 70.45,29.15 64.785,29.15 ; 48,28.393 48,35.393 ; 48,28.393 49.393,27 50.095,27 53.847,27 56.1,29.253 56.1,31.344 58.106,33.35 58.377,33.35 58.527,33.5 61.566,33.5 62.67,32.396 63.275,32.396 64.785,30.886 64.785,29.15
VFB: R2.1 R3.2 U2.1 | length 2.7
  Bottom Layer w0.2: U2.1 R3.2 R2.1
pads on no net: J3.ID SW3.3 SW3.4 U7.22

## Polygon pours and split planes (outlines as drawn)
GND on Top Layer "NONET_L-01_P-001" (solid, pour order 2): 0,0 0,67 140,67 140,0
GND on Bottom Layer "NONET_L-01_P-001" (solid, remove dead copper, pour order 4): -0.029,-0.064 -0.029,66.936 139.971,66.936 139.971,-0.064

## Silkscreen, mask and mechanical layers (free items; w line width, h text height)
Bottom Overlay:
  text "JLCJLCJLCJLCJLC" at 19.8,27.9 h1.2 r270
  text "Leoblinky 2018.ORI / 2018-07 RevC" at 21.325,22 h1.6 r270
  text "LeoBlinky 2018" at 115.525,17.6 h4
  text "Produced by Honghong and Matt" at 31.5,8.6 h1 r270
Top Solder:
  text "ORI" at 2.5,11 h45
Mechanical 1:
  the board outline again, w0.1

## Text inside footprints (layer, text, board x,y; h text height)
Designator24: Bottom Overlay "KIN" at 23.8,15.3 h3 r270; Bottom Overlay "LABS" at 21.7,15.3 h3 r270; Bottom Overlay "BLIN" at 25.9,15.3 h3 r270